# Altium PCB DustCollectorSwitch.PcbDoc
Units mm, origin at the board's own origin, x right, y up, seen from the top; angles counter-clockwise.
Board outline 53.34 x 68.71 mm, 2 copper layers (Top Layer, Bottom Layer); 52 components, 30 nets, 162 pads, 40 vias.
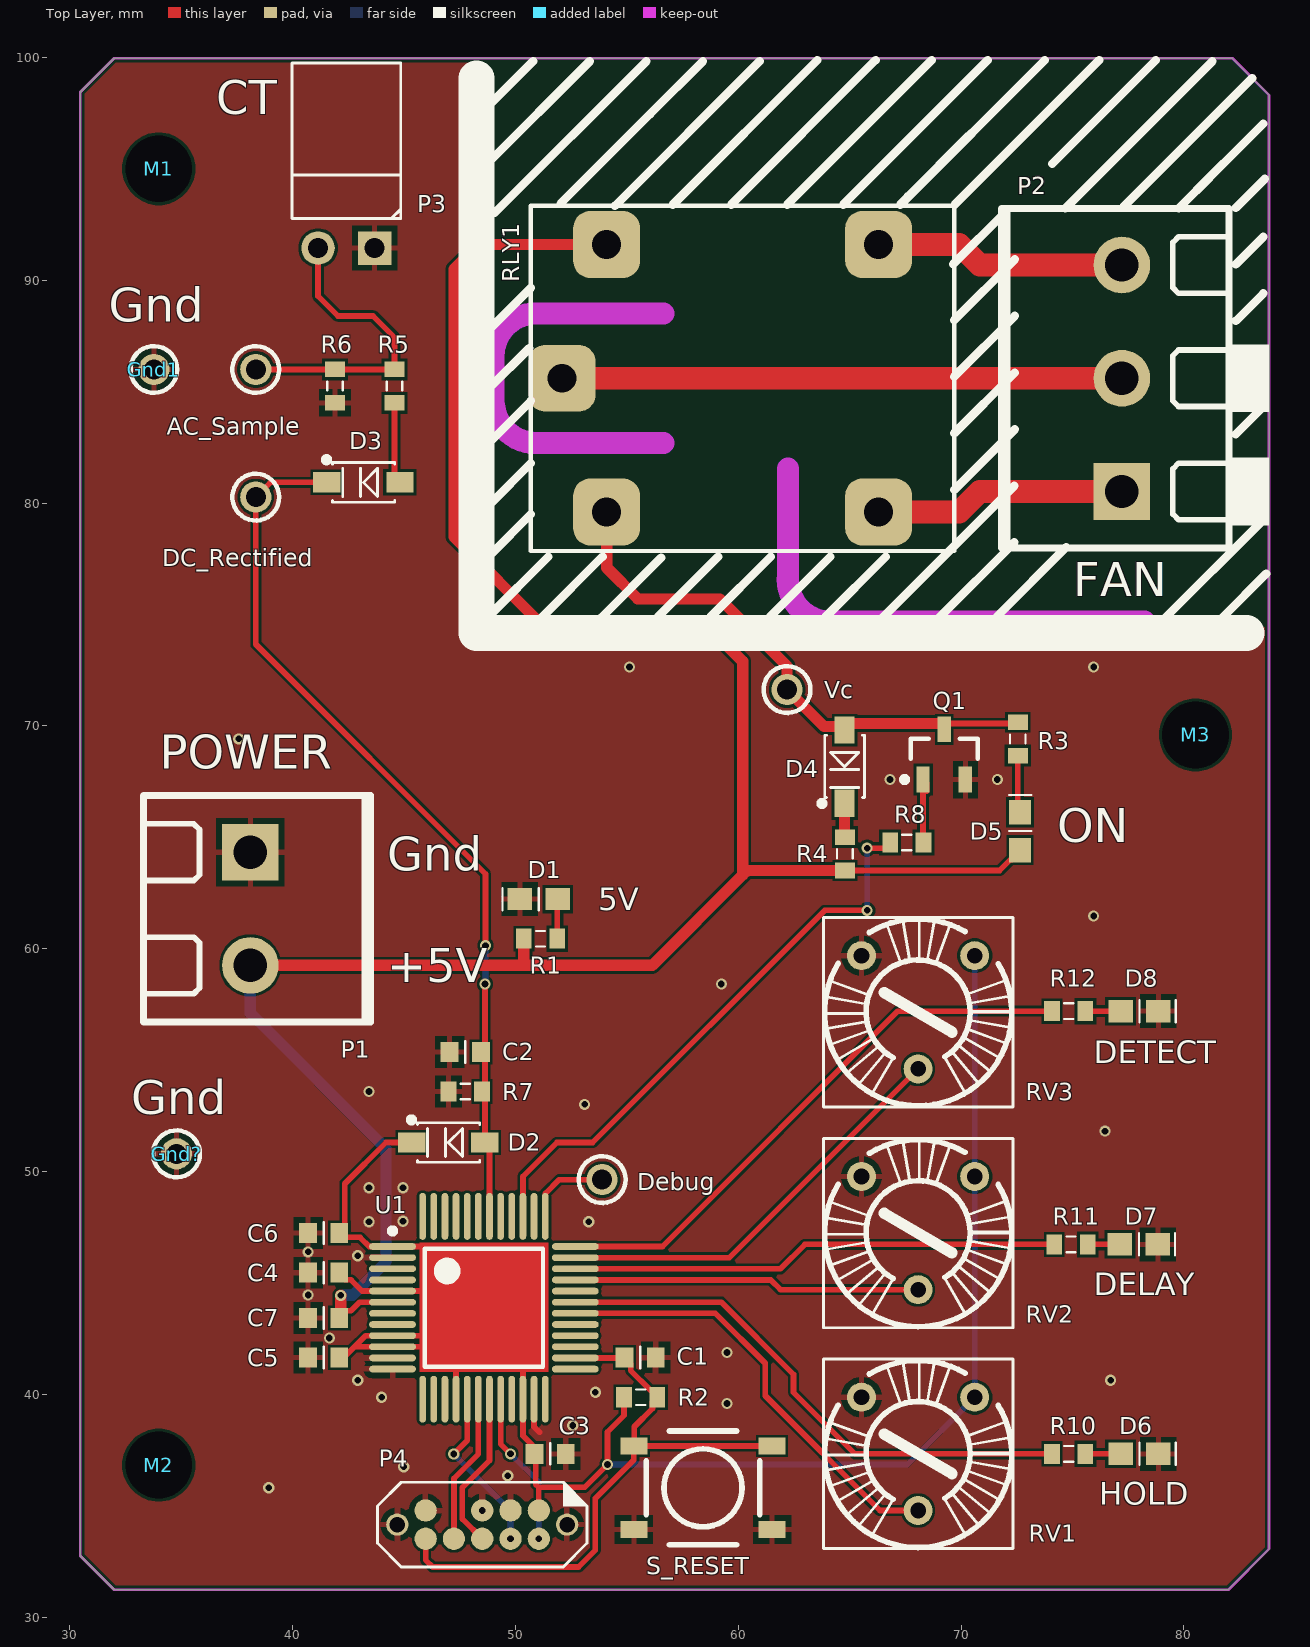
[diagram p0: Top Layer view]
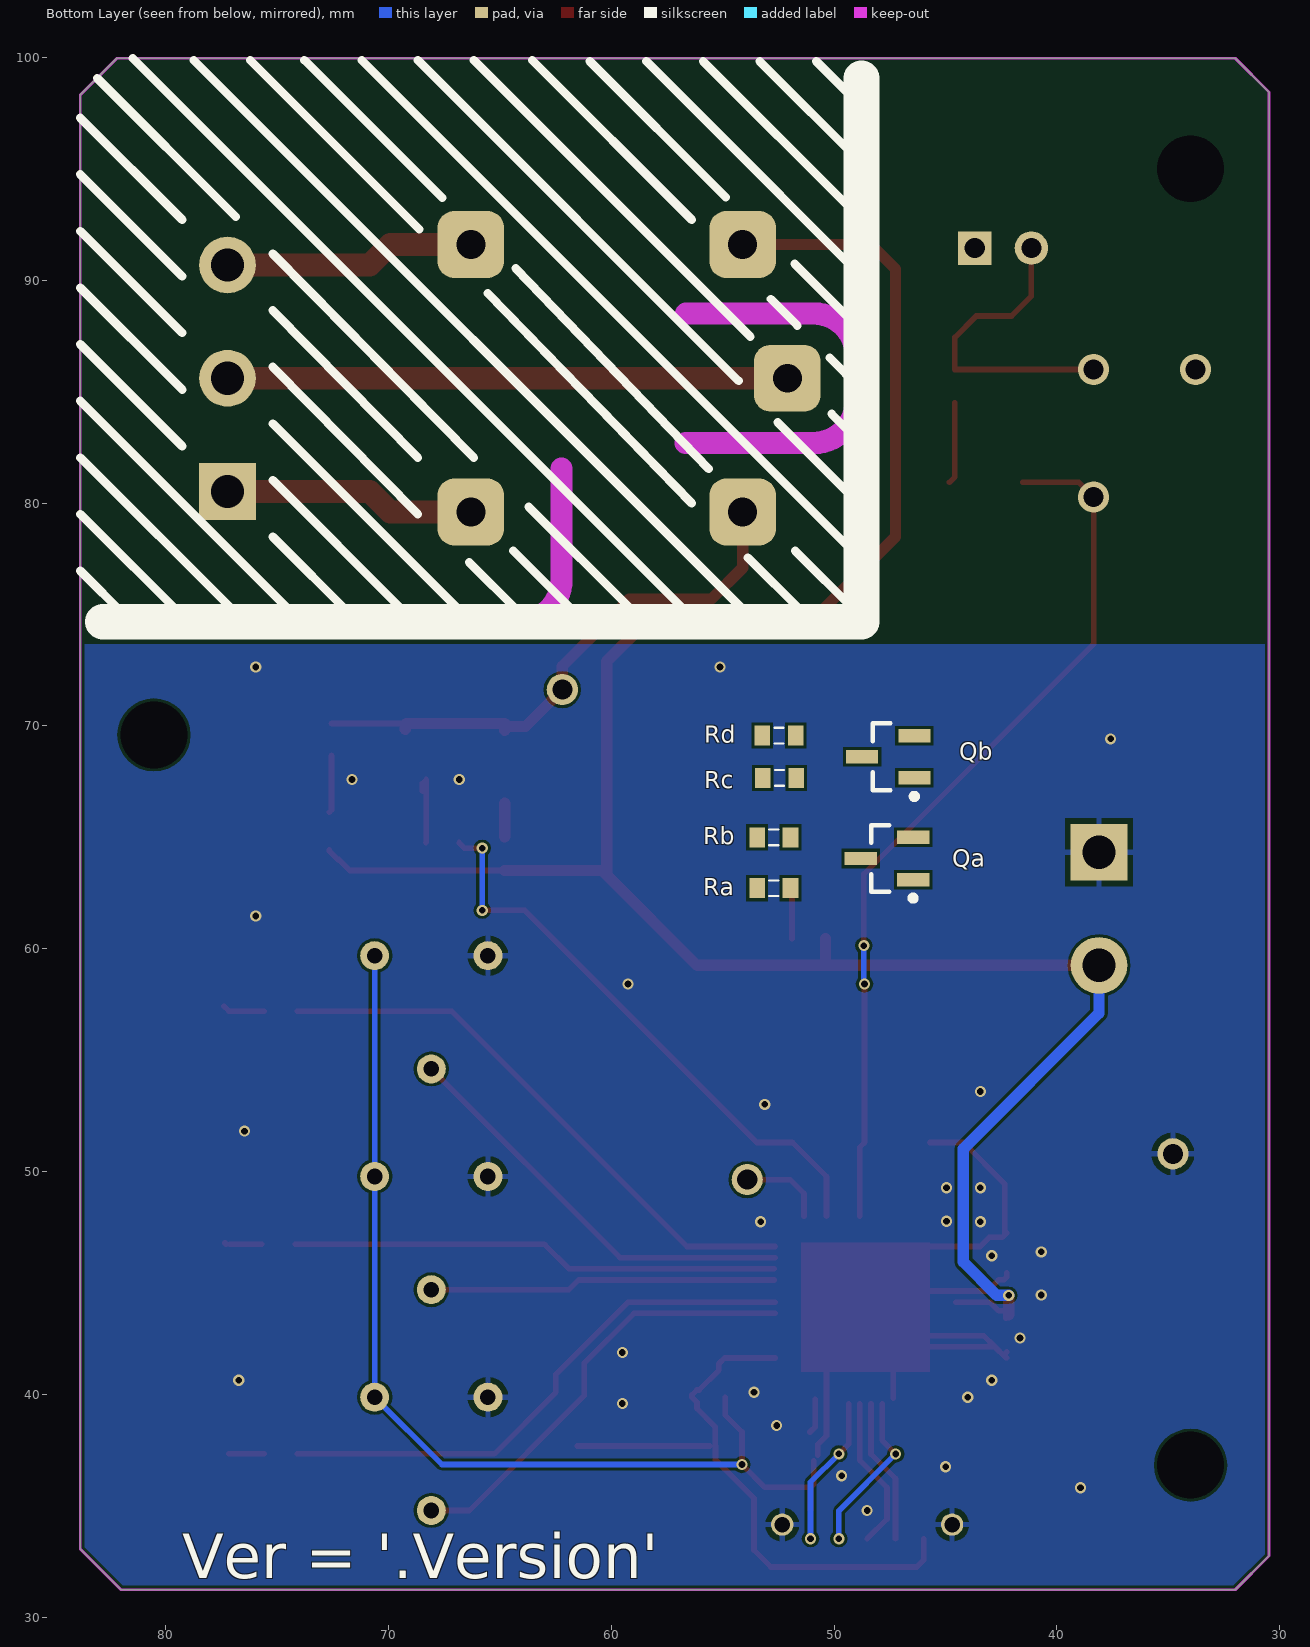
[diagram p1: Bottom Layer view, seen from below]
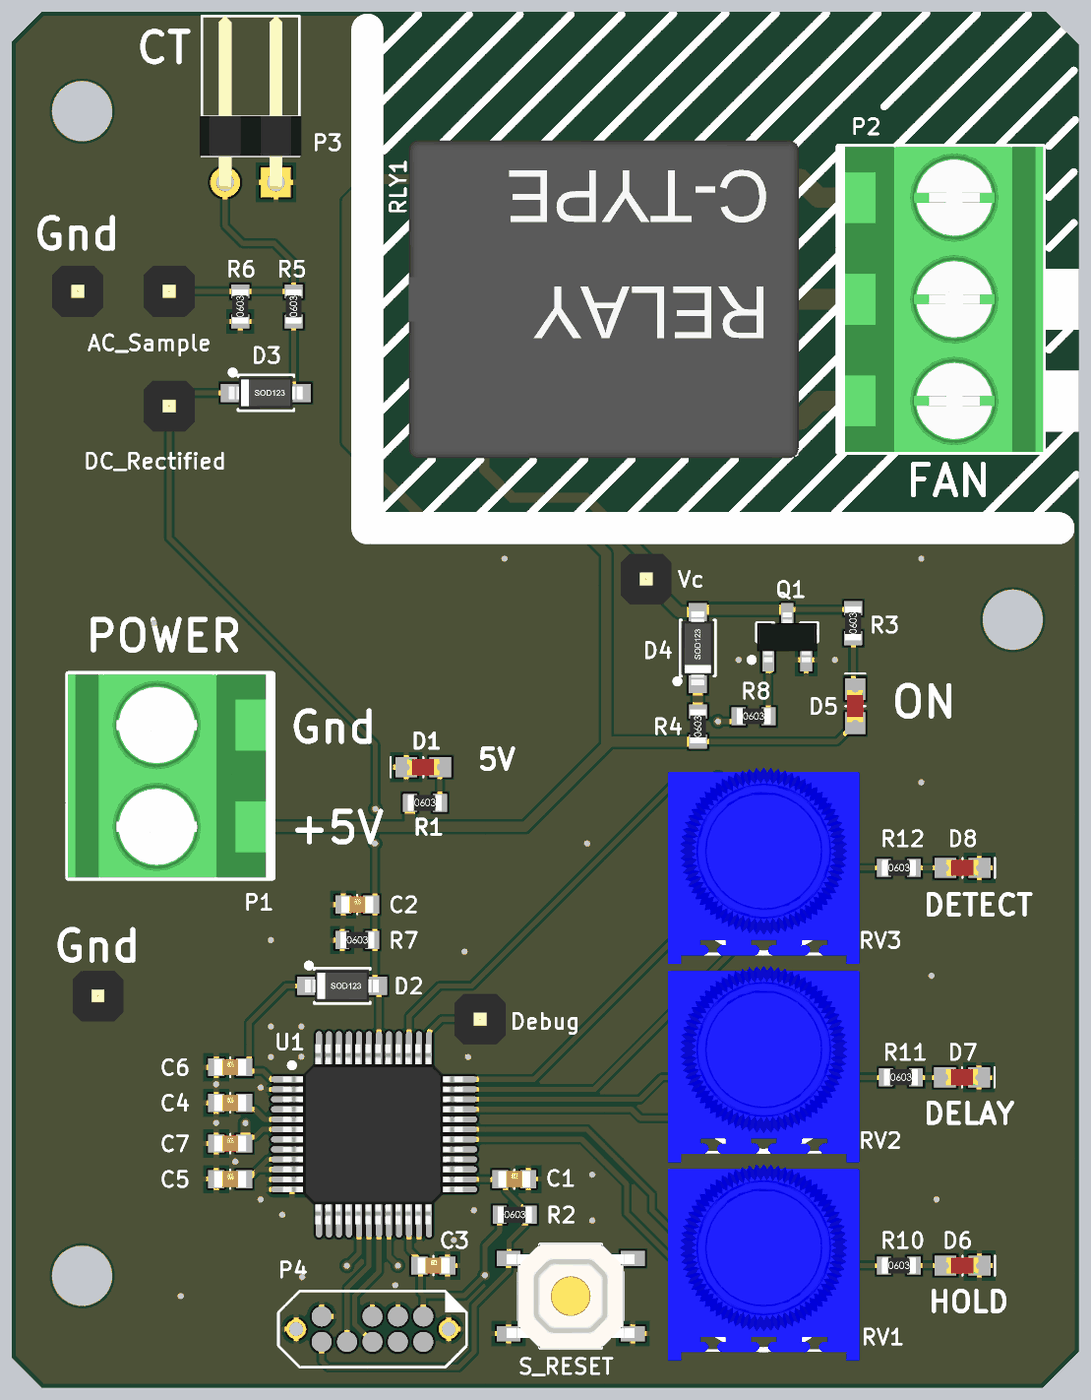
[diagram p2: 3D render of the assembled board from above, using the file's embedded part models]
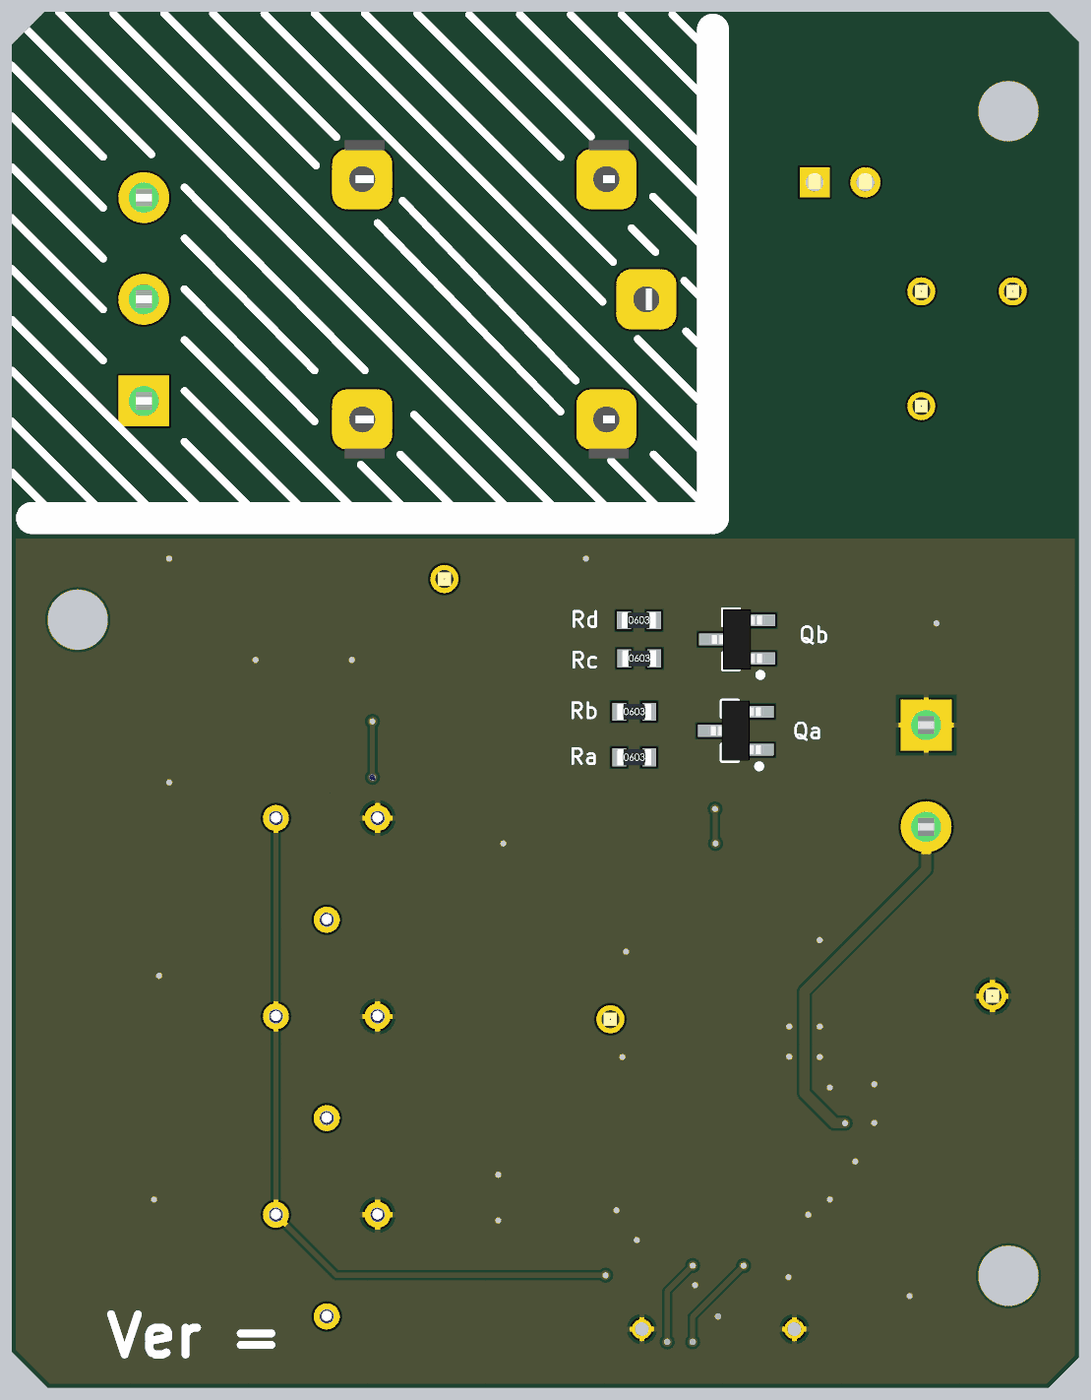
[diagram p3: 3D render of the assembled board from below, using the file's embedded part models]

## Layer stack, top to bottom
Top Solder: solder mask 0.0102, Solder Resist, Dk 3.5
Top Layer: signal copper 0.0356
Dielectric1: dielectric 0.32, FR-4, Dk 4.8
Bottom Layer: signal copper 0.0356
Bottom Solder: solder mask 0.0102, Solder Resist, Dk 3.5

## Board outline
32,31.242 30.48,32.762 30.48,98.434 32,99.954 82.18,99.954 83.82,98.314 83.82,33.062 82,31.242

## Design rules (kind name [scope] priority, off if disabled: settings)
Clearance [All] p1: gap=0.127 ignorepadtopadclearanceinfootprint=FALSE
HoleSize [All] p1: absolutevalues=TRUE maxlimit=3.5 minlimit=0.025 maxpercent=80.000 minpercent=20.000
MinimumSolderMaskSliver [All] p1 off: minsoldermaskwidth=0.254
PolygonConnect PolygonConnect_Via [IsPolygon vs IsVia] p1: connectstyle=Direct reliefconductorwidth=0.254 reliefentries=4 polygonreliefangle="90 Angle" airgapwidth=0.254
PolygonConnect [All] p2: connectstyle=Relief reliefconductorwidth=0.254 reliefentries=4 polygonreliefangle="90 Angle" airgapwidth=0.254
RoomDefinition DustCollectorSwitch_V2 [InComponentClass('DustCollectorSwitch_V2')] p1: confinementstyle=ConfineIn formatcopy=TRUE lockcomponents=FALSE outline 25.4,27.915 88.9,27.915 88.9,105.791 25.4,105.791
RoutingVias [All] p1: holewidth=0.711 width=1.27 viastyle="Through Hole" minholewidth=0.711 minwidth=1.27 maxholewidth=0.711 maxwidth=1.27
SilkToSolderMaskClearance SilkscreenOverComponentPads [IsPad] p1 off: minsilkscreentomaskgap=0.254 clearancetoexposedcopper=TRUE
SolderMaskExpansion SolderMaskExpansion_Via [isVia] p1: expansion=0.102 istentingtop=TRUE
SolderMaskExpansion [All] p2: expansion=0.102 istentingtop=FALSE
Width [All] p1: maxlimit=1.016 minlimit=0.254 preferedwidth=0.254
27 further rules are at their usual default settings.

## Components (designator, comment, footprint, x,y, rotation, side; value= is the part's Value field where it differs from the comment)
AC_Sample "" "PCBPIN - 0.9mm" 38.354,85.993 r0 top
C1 "100nF" CCNP1608-0603_N 55.601,41.656 r0 top
C2 "100nF" CCNP1608-0603_N 47.752,55.372 r0 top
C3 "100nF" CCNP1608-0603_N 51.562,37.338 r0 top
C4 "100nF" CCNP1608-0603_N 41.402,45.466 r0 top
C5 "100nF" CCNP1608-0603_N 41.402,41.656 r0 top
C6 "2.2uF" CCNP1608-0603_N 41.402,47.244 r0 top
C7 "1uF" CCNP1608-0603_N 41.402,43.434 r0 top
D1 "LED Red" LED1608-0603-RED 51.054,62.23 r0 top
D2 "1N4148W" SOD-123 46.99,51.308 r0 top
D3 "1N4148W" SOD-123 43.18,80.926 r0 top
D4 "1N4148W" SOD-123 64.77,68.17 r90 top
D5 "LED Red" LED1608-0603-RED 72.644,65.278 r270 top
D6 "LED Red" LED1608-0603-RED 78.003,37.338 r180 top
D7 "LED Red" LED1608-0603-RED 77.978,46.736 r180 top
D8 "LED Red" LED1608-0603-RED 78.003,57.201 r180 top
DC_Rectified "" "PCBPIN - 0.9mm" 38.354,80.264 r0 top
Debug "Vdd" "PCBPIN - 0.9mm" 53.895,49.642 r0 top
Gnd1 "Gnd" "PCBPIN - 0.9mm" 33.782,85.993 r0 top
Gnd? "Gnd" "PCBPIN - 0.9mm" 34.798,50.8 r0 top
M1 "Mounting hole" "3mm hole" 34,94.996 r0 top
M2 "Mounting hole" "3mm hole" 34,36.83 r0 top
M3 "Mounting hole" "3mm hole" 80.518,69.596 r0 top
P1 "Terminal2_5.08mm" MOLEX-39544-3002 38.112,64.333 r180 top
P2 "Terminal3_5.08mm" MOLEX-39544-3003 77.216,80.518 r0 top
P3 "Header, 2-Pin, Right Angle" HDR1X2H 43.688,91.44 r180 top
P4 "SWD Connector 2x5-Pin" SWD-2x5-Jig-Pads 51.054,34.798 r180 top
Q1 "MMBT3904LT1G" SOT23_N 69.244,68.718 r270 top
Qa "DNP" SOT23_M 47.625,64.049 r180 bottom
Qb "DNP" SOT23_M 47.567,68.615 r180 bottom
R1 "1K" CR1608-0603_N 51.134,60.452 r0 top
R2 "1K" CR1608-0603_N 55.626,39.878 r0 top
R3 "1K" CR1608-0603_N 72.546,69.418 r90 top
R4 "220R" CR1608-0603_N 64.786,64.262 r90 top
R5 "470R" CR1608-0603_N 44.577,85.243 r90 top
R6 "470R" CR1608-0603_N 41.91,85.243 r90 top
R7 "10K" CR1608-0603_N 47.752,53.594 r0 top value=10k
R8 "220R" CR1608-0603_N 67.564,64.77 r0 top
R10 "1K" CR1608-0603_N 74.828,37.338 r0 top
R11 "1K" CR1608-0603_N 74.93,46.736 r0 top
R12 "1K" CR1608-0603_N 74.828,57.201 r0 top
Ra "DNP" CR1608-0603_N 52.705,62.718 r180 bottom
Rb "DNP" CR1608-0603_N 52.705,64.999 r180 bottom
Rc "DNP" CR1608-0603_N 52.451,67.665 r180 bottom
Rd "DNP" CR1608-0603_N 52.47,69.565 r180 bottom
RLY1 "ORWH-SH-105D1F,000" "RELAY - ORWH-SH" 60.198,85.598 r0 top
RV1 "1K" RV_PCB5 68.072,37.338 r270 top
RV2 "1K" RV_PCB5 68.072,47.244 r270 top
RV3 "1K" RV_PCB5 68.072,57.15 r270 top
S_RESET "SMD-SW-4_5.1x5.1x3.5_M" SMD-SW-4_5.1x5.1x3.5_M 58.42,35.814 r0 top
U1 "MK20DX128VLF5" TSQFP50P900X900-48M 48.59,43.891 r270 top
Vc "" "PCBPIN - 0.9mm" 62.192,71.628 r0 top

## Footprints (in the part's own frame and the unit in brackets; to place one, negate y for a bottom-side part, rotate by r counter-clockwise, add the part's x,y. Pads: shape width x height; smd on the part's side, far side on the other; paste and mask are expansions set on the pad)
"3mm hole" [mil]
  round 60 hole 118.11: 0(0,0)
CCNP1608-0603_N [mm]
  rect 0.8x0.9 smd: 1(-0.7,0) 2(0.7,0)
  silkscreen extent 0,-0.48 0,0.48, body extent -0.8,-0.4 0.8,0.4, height 0.3
CR1608-0603_N [mm]
  rect 0.7x0.9 smd: 1(-0.75,0) 2(0.75,0)
  silkscreen extent -0.2,-0.35 0.2,0.35, body extent -0.85,-0.4 0.85,0.4, height 0.56
HDR1X2H [mm] "Header; 2 Position; Right Angle"
  rect 1.5x1.5 hole 0.9: 1(0,0)
  round 1.5 hole 0.9: 2(2.54,0)
  silkscreen extent -1.17,-8.31 3.71,-1.32, body extent -1.27,-8.3 3.81,0.33, height 2.54
LED1608-0603-RED [mm] "SMT-LED 0603"
  rect 1.1x1 smd: A(0.85,0) K(-0.85,0)
  silkscreen extent -1.62,-0.5 0,0.5, body extent -0.8,-0.4 0.8,0.4, height 0.7
MOLEX-39544-3002 [mm] "Wire-To-Board Terminal Block"
  rect 2.54x2.54 hole 1.5: 1(0,0)
  round 2.54 hole 1.5: 2(0,5.08)
  silkscreen extent -5.4,-2.54 4.83,7.62, body extent -5.08,-2.54 4.83,7.62, height 14.6
MOLEX-39544-3003 [mm] "Wire-To-Board Terminal Block"
  rect 2.54x2.54 hole 1.5: 1(0,0)
  round 2.54 hole 1.5: 2(0,5.08) 3(0,10.16)
  silkscreen extent -5.4,-2.54 4.83,12.7, body extent -5.08,-2.54 4.83,12.7, height 14.6
"PCBPIN - 0.9mm" [mm]
  round 1.4 hole 0.9: 1(0,0)
  silkscreen extent -1.05,-1.05 1.05,1.05, body extent -1.27,-1.27 1.27,1.27, height 6
"RELAY - ORWH-SH" [mm] "Relay, PCB Mount, ORWH Series"
  rrect50% 3x3 hole 1.3: C1(-6.1,6) C2(-6.1,-6) COM(-8.1,0) NC(6.1,6) NO(6.1,-6)
  silkscreen extent -9.5,-7.75 9.5,7.75, body extent -9.88,-7.95 9.62,7.95, height 15
RV_PCB5 [mm] "Vishay 63M-T607 (F347-292 or similar)"
  round 1.3 hole 0.7: CCW(-2.54,-2.54) CW(-2.54,2.54) W(2.54,0)
  silkscreen extent -4.25,-4.25 4.25,4.25, body extent -5.08,-4.79 4.75,4.79, height 4.42
SMD-SW-4_5.1x5.1x3.5_M [mm] "Miniature SMD PCB Push Button - C318886"
  rect 1.2x0.762 smd: 1(3.1,-1.875) 1b(-3.1,-1.875) 2(3.1,1.875) 2b(-3.1,1.875)
  silkscreen extent -2.55,-2.55 2.55,2.55, body extent -3.2,-2.65 3.2,2.65, height 3.5
SOD-123 [mm] "SOD-123; 2 Leads; Body 2.7 x 1.6 mm, (LxW)"
  rect 1.22x0.91 smd: A(1.64,0) K(-1.64,0)
  silkscreen extent -1.78,-0.89 1.41,1.14, body extent -1.85,-0.77 1.85,0.78, height 1.35
SOT23_M [mm] "SOT23, 3-Leads, Body 2.9x1.3mm, Pitch 0.95mm, Lead Span 2.3mm - IPC Low Density"
  rect 1.45x0.6 smd: 1(1.175,-0.95) 2(1.175,0.95) 3(-1.175,0)
  silkscreen extent -0.7,-1.9 1.29,1.5, body extent -1.25,-1.5 1.25,1.5, height 1.05
SOT23_N [mm] "SOT23, 3-Leads, Body 2.9x1.3mm, Pitch 0.95mm, Lead Span 2.3mm - IPC Medium Density"
  rect 1.15x0.6 smd: 1(1.125,-0.95) 2(1.125,0.95) 3(-1.125,0)
  silkscreen extent -0.7,-1.9 1.25,1.5, body extent -1.25,-1.5 1.25,1.5, height 1.05
SWD-2x5-Jig-Pads [mm] "Connector; SWD; 2x5 Position"
  round 1 hole 0.69: 0(-1.27,0.635) 0(6.35,0.635)
  round 1 smd: 1(0,0) 2(0,1.27) 3(1.27,0) 4(1.27,1.27) 5(2.54,0) 6(2.54,1.27) 8(3.81,1.27) 9(5.08,0) 10(5.08,1.27)
  silkscreen extent -2.16,-1.26 7.24,2.53
TSQFP50P900X900-48M [mm] "Thin QFP, 48-Leads, Body 7x7mm, Pitch 0.5mm, IPC Low Density"
  oval 0.3x2.1 smd: 1(-2.75,-4.1) 2(-2.25,-4.1) 3(-1.75,-4.1) 4(-1.25,-4.1) 5(-0.75,-4.1) 6(-0.25,-4.1) 7(0.25,-4.1) 8(0.75,-4.1) 9(1.25,-4.1) 10(1.75,-4.1) 11(2.25,-4.1) 12(2.75,-4.1) 25(2.75,4.1) 26(2.25,4.1) 27(1.75,4.1) 28(1.25,4.1) 29(0.75,4.1) 30(0.25,4.1) 31(-0.25,4.1) 32(-0.75,4.1) 33(-1.25,4.1) 34(-1.75,4.1) 35(-2.25,4.1) 36(-2.75,4.1)
  oval 2.1x0.3 smd: 13(4.1,-2.75) 14(4.1,-2.25) 15(4.1,-1.75) 16(4.1,-1.25) 17(4.1,-0.75) 18(4.1,-0.25) 19(4.1,0.25) 20(4.1,0.75) 21(4.1,1.25) 22(4.1,1.75) 23(4.1,2.25) 24(4.1,2.75) 37(-4.1,2.75) 38(-4.1,2.25) 39(-4.1,1.75) 40(-4.1,1.25) 41(-4.1,0.75) 42(-4.1,0.25) 43(-4.1,-0.25) 44(-4.1,-0.75) 45(-4.1,-1.25) 46(-4.1,-1.75) 47(-4.1,-2.25) 48(-4.1,-2.75)
  silkscreen extent -3.57,-4.22 2.65,2.65, body extent -4.5,-4.55 4.5,4.45, height 1.6

## Part data
AC_Sample DC_Rectified Debug Gnd1 Gnd? Vc: library part TP, "Test Point"
C1 C2 C3 C4 C5: library part Cap_CCNP_0603_100nF, "Capacitor non-polar SMT 0603", LCSC=C14663, Manufacturer="Generic Components", Class=Passive, Published=08/06/2000, Publisher="Altium Hobart Technology Centre", SubClass=Capacitor
C6: library part Cap, "Capacitor", LCSC=C23630, Manufacturer="Generic Components", Class=Passive, Published=08/06/2000, Publisher="Altium Hobart Technology Centre", SubClass=Capacitor
C7: library part Cap, "Capacitor", LCSC=C15849, Manufacturer="Generic Components", Class=Passive, Published=08/06/2000, Publisher="Altium Hobart Technology Centre", SubClass=Capacitor
D1 D5 D6 D7 D8: library part LED-0603-Red, "LED 0603 Red", LCSC=C2286, Manufacturer="Generic Components", Class I=Optoelectronic, Class II=LED, Farnell PN=1581239, Published=8-Jun-2000, Publisher="Altium Limited", Revision="July-2002: Re-released for DXP Platform."
D2 D3 D4: "Diode - Switching 75V 150mA 1.25V @ 150mA 4ns, SOD-123", LCSC=C81598, Class=Discrete, SubClass="Diode - Switching"
M1 M2 M3: library part Mounting_Hole
P1: "MULTICOMP MC24366 TERMINAL BLOCK EUROSTYLE, 2 POSITION, 26-12AWG, 5.08mm", Farnell PN=2396251
P2: "MULTICOMP MC24367 TERMINAL BLOCK EUROSTYLE, 3 POSITION, 26-12AWG, 5.08mm"
P3: library part "Header 1x2H", LatestRevisionDate=17-Jul-2002, LatestRevisionNote="Re-released for DXP Platform.", Publisher="Altium Limited"
P4: library part SWD2X5_JIG, Farnell PN=1865285, LatestRevisionDate=17-Jul-2002, LatestRevisionNote="Re-released for DXP Platform.", Publisher="Altium Limited"
Q1: "General Purpose Transistor, NPN Silicon, 3-Pin SOT-23, Pb-Free, Tape and Reel", LCSC=C20526, Manufacturer="On Semiconductor", ComponentLink1Description="Manufacturer URL", ComponentLink1URL=http://www.onsemi.com/, ComponentLink2Description=Datasheet, ComponentLink2URL=http://www.onsemi.cn/pub_link/Collateral/MMBT3904LT1-D.PDF, ComponentLink3Description="Package Specification", ComponentLink3URL=http://www.onsemi.cn/pub_link/Collateral/318-08.PDF, DatasheetVersion="Rev. 12", fT Min (MHz)=300, IC Continuous (A)=0.2, Mounting Technology="Surface Mount", PackageDescription="3-Pin Small Outline Transistor, Body 2.92 x 1.3 mm, Pitch 0.95 mm", PackageReference=SOT-23-3-318-08, PackageVersion="Rev. AP, 11/2009", Packing="Tape and Reel", PartNumber=MMBT3904LT1G, Polarity=NPN, RoHS=TRUE
Qa Qb: library part MMBT3904LT1G, "SOT23", ComponentLink1Description="Manufacturer URL", ComponentLink1URL=http://www.onsemi.com/, ComponentLink2Description=Datasheet, ComponentLink2URL=http://www.onsemi.cn/pub_link/Collateral/MMBT3904LT1-D.PDF, ComponentLink3Description="Package Specification", ComponentLink3URL=http://www.onsemi.cn/pub_link/Collateral/318-08.PDF
R1 R2 R3 R10 R11 R12: library part Res_CR0603, "Resistor SMT 0603", LCSC=C21190, Manufacturer="Generic Components", Class=Passive, Published=08/06/2000, Publisher="Altium Hobart Technology Centre", SubClass=Resistor
R4 R8: library part Res_CR0603_220R, "Resistor SMT 0603", LCSC=C22962, Manufacturer="Generic Components", Class=Passive, Published=08/06/2000, Publisher="Altium Hobart Technology Centre", SubClass=Resistor
R5 R6: library part Res_CR0603_470R, "Resistor SMT 0603", LCSC=C23179, Manufacturer="Generic Components", Class=Passive, Published=08/06/2000, Publisher="Altium Hobart Technology Centre", SubClass=Resistor
R7: library part Res_CR0603_10k, "Resistor SMT 0603", LCSC=C25804, Manufacturer="Generic Components", Class=Passive, Published=08/06/2000, Publisher="Altium Hobart Technology Centre", SubClass=Resistor
Ra Rb Rc Rd: library part Res_CR0603, "Resistor SMT 0603", Manufacturer="Generic Components", Class=Passive, Published=08/06/2000, Publisher="Altium Hobart Technology Centre", SubClass=Resistor
RLY1: library part "Relay - ORWH-SH-105D1F", "Relay, ORWH Series, Power, Non Latching, SPDT, 5 VDC, 10 A", Farnell PN=1181034
RV1 RV2 RV3: library part POT_BOURNS_3362P, "Trim Pot - single turn horizontal", Farnell PN="9354298 or similar"
S_RESET: library part SW_PB-TS, "Tactile Switch SPST 5.10mm X 5.10mm / (1.5mm=C318884) / (2.0mm=C318888) / (3.5mm=C318886)", LCSC=C318886, Revision=1.0
U1: "Micro Kinetis K20: 50MHz Cortex-M4 Performance MCU, 160KB Flash, 16KB SRAM, Full-Speed USB, 48-LQFP", Digikey=MK20DX128VLF50-ND, Farnell PN=2133571, Mouser=841-MK20DX128VLF5

## Via types
v1: diameter 0.5, hole 0.3, Top Layer to Bottom Layer, tented both sides, 40 vias

## Nets (pads, with @x,y where several pads share a name; then routed paths per layer and width w, separated by ;. In a path a pad name is that pad's centre, name@x,y a point inside that pad or via, vN(x,y) a via of type N, cw(c..) or ccw(c..) an arc to the next point about the centre after c; other vN are vias at no path point)
3V3: C3.1 C4.2 C5.2 C6.2 D2.K P4.1 R2.1 RV1.CW RV2.CW RV3.CW U1.1 U1.5 U1.9 U1.10 U1.16 U1.22 | length 78.9
  Top Layer w0.254: C5.2@42.252,41.656 42.302,41.656 42.787,42.141 ; C5.2@42.252,41.91 C5.2@42.275,41.887 ; C4.2@42.252,45.466 42.252,45.266 42.375,45.143 42.625,45.143 43.127,44.641 46.622,44.641 46.634,44.653 ; C6.2@42.252,47.244 42.446,47.05 43.034,47.05 43.443,46.641 45.84,46.641 46.292,46.189 46.622,46.189 ; C6.2@42.347,47.244 42.347,49.459 44.196,51.308 D2.K D2.K@45.7,51.308 ; U1.9 43.287,42.641 42.787,42.141 ; U1.9@44.54,42.641 46.622,42.641 ; 46.34,42.141 42.787,42.141 ; 47.324,41.641 47.34,41.625 U1.16@47.34,39.841 ; 50.089,41.783 50.34,41.532 50.34,38.405 ; U1.22 50.34,38.151 50.725,37.766 C3.1@50.725,37.271 ; C3.1@50.917,37.029 50.917,35.97 51.054,35.833 ; P4.1 51.054,35.833 ; R2.1 54.876,39.062 54.134,38.32 v1(54.134,36.857) 53.11,35.833 51.054,35.833
  Bottom Layer w0.254: v1(54.134,36.857) 67.591,36.857 RV1.CW RV2.CW RV3.CW
5V: C7.2 D5.A P1.2 R1.1 R4.1 RLY1.C1 U1.6 | length 104.1
  Top Layer w0.254: C7.2@42.302,43.434 42.302,43.684 42.375,43.757 42.625,43.757 43.009,44.141 U1.6@44.54,44.141 ; R4.1 71.728,63.512 72.221,64.005 72.271,64.005 72.644,64.378 D5.A
  Top Layer w0.508: P1.2 50.379,59.253 ; C7.2@42.164,43.572 v1(42.164,44.45) ; R1.1 50.384,59.258 50.379,59.253 ; RLY1.C1 48.349,91.598 47.244,90.493 47.244,78.486 51.308,74.422 58.674,74.422 60.198,72.898 60.198,63.557 60.198,63.306 ; R4.1 60.404,63.512 60.198,63.306 ; 50.379,59.253 56.145,59.253 60.198,63.306
  Bottom Layer w0.508: P1.2 38.112,57.111 44.196,51.027 44.196,45.949 42.697,44.45 v1(42.164,44.45)
AC_Sample: AC_Sample.1 P3.2 R5.2 R6.2 | length 14
  Top Layer w0.254: AC_Sample.1 R6.2 R5.2 44.577,87.432 43.617,88.392 42.037,88.392 41.148,89.281 P3.2
COM: P2.2 RLY1.COM | length 25.1
  Top Layer w1.016: RLY1.COM P2.2
CurrentSample: C2.2 D2.A D3.K DC_Rectified.1 R7.2 U1.42 | length 40.1
  Top Layer w0.254: D3.K 39.016,80.926 DC_Rectified.1 38.354,73.66 48.662,63.352 v1(48.662,60.142) ; v1(48.635,58.42) 48.635,51.313 D2.A 48.84,51.098 U1.42
  Bottom Layer w0.254: v1(48.635,58.42) 48.662,58.447 v1(48.662,60.142)
DelayControl: RV2.W U1.33 | length 15.6
  Top Layer w0.254: U1.33 61.46,45.141 61.897,44.704 RV2.W
DelayLed: R11.1 U1.34 | length 21.9
  Top Layer w0.254: U1.34 61.897,45.641 62.992,46.736 R11.1
DetectLed: R12.1 U1.36 | length 25.8
  Top Layer w0.254: U1.36@52.64,46.641 56.599,46.641 67.159,57.201 R12.1
GND: C1.2 C2.1 C3.2 C4.1 C5.1 C6.1 C7.1 D1.K D6.K D7.K D8.K Gnd1.1 Gnd?.1 P1.1 P3.1 P4.0 P4.3 P4.5 P4.9 Q1.2 R6.1 R7.1 RV1.CCW RV2.CCW RV3.CCW S_RESET.1 S_RESET.1b U1.2 U1.11 U1.12 U1.23 | length 1.6
  Top Layer w0.254: U1.23 50.84,38.556 51.09,38.306
  other v1: 48.514,34.798 38.938,35.814 49.659,36.355 44.995,36.761 52.578,38.608 59.499,39.594 44.001,39.878 53.59,40.102 42.926,40.64 76.708,40.64 59.499,41.882 41.656,42.533 40.702,44.465 42.926,46.228 40.702,46.4 43.434,47.752 53.293,47.752 44.958,47.773 43.434,49.276 44.958,49.276 76.454,51.816 53.11,53.017 43.434,53.594 59.245,58.42 75.946,61.468 66.814,67.593 71.628,67.593 37.592,69.418 55.118,72.644 75.946,72.644
HoldControl: RV1.W U1.30 | length 19.9
  Top Layer w0.254: U1.30@52.64,43.641 58.975,43.641 61.214,41.402 61.214,39.947 66.363,34.798 RV1.W
HoldLed: R10.1 U1.31 | length 24.7
  Top Layer w0.254: U1.31@52.64,44.141 59.245,44.141 62.484,40.902 62.484,40.095 65.241,37.338 R10.1
LevelControl: RV3.W U1.35 | length 18.9
  Top Layer w0.254: U1.35@52.64,46.141 59.603,46.141 RV3.W
N/C: P2.3 RLY1.NC | length 11.3
  Top Layer w1.016: RLY1.NC 69.916,91.598 70.836,90.678 P2.3
N/O: P2.1 RLY1.NO | length 11.3
  Top Layer w1.016: RLY1.NO 69.916,79.598 70.836,80.518 P2.1
NetD1_A: D1.A R1.2 | length 1.8
  Top Layer w0.254: R1.2 51.884,62.21 D1.A
NetD3_A: D3.A R5.1 | length 3.7
  Top Layer w0.254: R5.1 44.577,81.169 D3.A
NetD4_K: D4.K R4.2 | length 1.5
  Top Layer w0.508: D4.K 64.77,65.028 R4.2
NetD5_K: D5.K R3.1 | length 2.6
  Top Layer w0.254: R3.1 72.546,66.226 D5.K
NetD6_A: D6.A R10.2 | length 1.6
  Top Layer w0.254: R10.2 D6.A
NetD7_A: D7.A R11.2 | length 1.5
  Top Layer w0.254: R11.2 D7.A ; D7.A@77.269,46.736 D7.A@77.33,46.797
NetD8_A: D8.A R12.2 | length 1.9
  Top Layer w0.254: R12.2 D8.A D8.A@77.38,57.428
NetDebug_1: Debug.1 U1.37 | length 3.8
  Top Layer w0.254: U1.37 51.349,48 51.349,49.019 51.971,49.642 Debug.1
NetQ1_1: Q1.1 R8.2 | length 3.4
  Top Layer w0.254: R8.2 68.294,64.79 Q1.1 68.467,67.42 Q1.1@68.467,67.071
RELAY: D4.A Q1.3 R3.2 RLY1.C2 Vc.1 | length 24.6
  Top Layer w0.254: Q1.3@69.417,70.104 R3.2@72.546,70.104
  Top Layer w0.508: RLY1.C2 54.098,77.093 55.499,75.692 59.182,75.692 62.192,72.682 Vc.1 63.851,69.969 64.611,69.969 D4.A ; D4.A@64.77,70.104 69.198,70.104 69.244,70.058 Q1.3
RelayDrive: R8.1 U1.39 | length 26.1
  Top Layer w0.254: U1.39 50.34,49.784 51.864,51.308 53.467,51.308 63.881,61.722 v1(65.786,61.722) ; v1(65.786,64.516) 66.591,64.516 66.814,64.739 R8.1
  Bottom Layer w0.254: v1(65.786,61.722) v1(65.786,64.516)
RESETb: C1.1 P4.10 R2.2 S_RESET.2 S_RESET.2b U1.26 | length 27.7
  Top Layer w0.254: P4.10 45.974,32.576 46.292,32.258 52.832,32.258 53.59,33.016 53.59,35.342 55.32,37.073 S_RESET.2b 55.335,37.704 55.335,38.556 56.153,39.374 56.153,39.655 R2.2 56.376,39.978 56.153,40.201 56.053,40.201 55.174,41.08 55.174,41.383 C1.1 54.886,41.641 U1.26@52.64,41.641 ; S_RESET.2b@55.574,37.689 S_RESET.2
SWD_CLK: P4.4 U1.17 | length 7.4
  Top Layer w0.254: v1(47.235,37.33) 47.84,37.935 U1.17@47.84,39.587
  Bottom Layer w0.254: v1(47.235,37.33) 49.784,34.781 v1(49.784,33.528)
SWD_DIO: P4.2 U1.20 | length 6.8
  Top Layer w0.254: U1.20@49.34,39.587 49.34,37.782 v1(49.784,37.338)
  Bottom Layer w0.254: v1(49.784,37.338) 51.054,36.068 v1(51.054,33.528)
SWD_Rx: P4.8 U1.18 | length 6.5
  Top Layer w0.254: P4.8 47.244,36.234 48.34,37.33 U1.18@48.34,39.587
SWD_Tx: P4.6 U1.19 | length 6.9
  Top Layer w0.254: P4.6 47.625,34.417 47.625,35.825 48.84,37.04 U1.19@48.84,39.587
pads on no net: M1.0 M2.0 M3.0 Qa.1 Qa.2 Qa.3 Qb.1 Qb.2 Qb.3 Ra.1 Ra.2 Rb.1 Rb.2 Rc.1 Rc.2 Rd.1 Rd.2 U1.3 U1.4 U1.7 U1.8 U1.13 U1.14 U1.15 U1.21 U1.24 U1.25 U1.27 U1.28 U1.29 U1.32 U1.38 U1.40 U1.41 U1.43 U1.44 U1.45 U1.46 U1.47 U1.48

## Polygon pours and split planes (outlines as drawn)
GND on Bottom Layer "tga" (solid, remove dead copper, pour order 0): 30.48,73.66 83.82,73.66 83.82,31.242 30.48,31.242
GND on Top Layer "GND_L01_P001" (solid, remove dead copper, pour order 1): 48.514,74.422 48.514,100.076 30.48,100.076 30.48,99.314 30.48,31.242 83.82,31.242 83.82,74.422

## Keep-outs
Keep-Out Layer:
  lines w0.127: 30.48,32.762 30.48,98.434 32,99.954 82.18,99.954 83.82,98.314 83.82,33.062 82,31.242 68.58,31.242 34.29,31.242 32,31.242 30.48,32.762
  lines w1: 49.018,86.597 cw(c50.927,86.597) 50.927,88.506 ; 49.022,86.597 49.022,84.599 ccw(c50.932,84.599) 50.932,82.69 ; 50.927,88.502 56.646,88.502 ; 50.932,82.694 56.651,82.694 ; 62.226,76.581 ccw(c64.135,76.581) 64.135,74.672 ; 62.23,76.581 62.23,81.534 ; 64.135,74.676 78.232,74.676

## Other copper
Top Layer:
  rectangle net 3V3: 45.695,41.021 51.486,46.812

## Silkscreen, mask and mechanical layers (free items; w line width, h text height)
Top Overlay:
  rectangle: 82.016,78.994 83.82,82.042
  rectangle: 82.016,84.074 83.82,87.122
  lines w0.381: 48.679,95.161 53.34,99.822 ; 48.764,74.872 51.486,77.594 ; 48.824,85.146 50.622,86.944 ; 48.848,97.87 50.8,99.822 ; 48.9,77.704 50.698,79.502 ; 48.9,79.99 50.698,81.788 ; 48.9,82.784 50.698,84.582 ; 48.9,87.864 50.698,89.662 ; 49.087,93.029 55.88,99.822 ; 51.19,74.872 53.912,77.594 ; 52.032,93.434 56.047,97.449 58.42,99.822 ; 53.818,74.824 56.54,77.546 ; 54.47,93.332 60.96,99.822 ; 56.384,74.872 59.106,77.594 ; 57.061,93.383 63.551,99.873 ; 58.746,74.872 61.468,77.594 ; 59.677,93.383 66.167,99.873 ; 61.411,74.872 64.133,77.594 ; 62.192,93.383 68.682,99.873 ; 63.908,74.872 66.63,77.594 ; 64.706,93.383 71.196,99.873 ; 66.49,74.872 72.39,80.772 ; 67.272,93.383 73.762,99.873 ; 67.612,93.76 70.334,96.482 ; 69.012,74.854 72.39,78.232 ; 69.644,90.712 72.016,93.083 ; 69.694,80.59 72.416,83.312 ; 69.694,83.13 72.416,85.852 ; 69.694,85.67 72.416,88.392 ; 69.694,88.21 72.416,90.932 ; 69.71,93.383 76.2,99.873 ; 71.628,74.93 74.713,78.015 ; 74.098,95.231 78.74,99.873 ; 74.676,93.218 81.28,99.822 ; 77.266,93.268 83.058,99.06 ; 78.972,74.654 83.566,79.248 ; 79.756,93.218 83.566,97.028 ; 80.297,96.299 81.788,97.79 ; 80.551,94.013 81.788,95.25 ; 81.744,74.886 83.693,76.835 ; 82.329,83.091 83.566,84.328 ; 82.329,88.171 83.566,89.408 ; 82.329,90.711 83.566,91.948 ; 82.329,93.251 83.629,94.551
  lines w1.6: 48.26,99.06 48.26,74.168 82.804,74.168
  text "CT" at 36.576,97.449 h1.52
  text "FAN" at 75.028,75.819 h1.52
  text "POWER" at 34.036,68.072 h1.52
  text "ON" at 74.324,64.77 h1.52
  text "Gnd" at 44.255,63.507 h1.52
  text "5V" at 53.715,61.73 h1.02
  text "+5V" at 44.255,58.491 h1.52
  text "DETECT" at 75.946,54.864 h1.02
  text "DELAY" at 75.946,44.45 h1.02
  text "HOLD" at 76.2,35.052 h1.02
Bottom Overlay:
  lines w0.381: 48.679,95.161 53.34,99.822 ; 48.724,90.126 56.047,97.449 58.42,99.822 ; 48.824,85.146 50.203,86.525 ; 48.848,97.87 50.8,99.822 ; 48.9,79.99 52.527,83.617 ; 48.9,82.784 50.114,83.998 ; 48.9,87.864 51.765,90.729 ; 48.97,77.646 71.196,99.873 ; 49.018,75.126 51.74,77.848 ; 49.087,93.029 55.88,99.822 ; 51.444,75.126 53.862,77.543 ; 51.641,87.963 52.832,89.154 ; 52.832,74.872 53.739,74.872 78.74,99.873 ; 53.759,87.465 66.167,99.873 ; 54.287,85.478 68.682,99.873 ; 54.864,93.726 60.96,99.822 ; 55.626,81.534 64.283,90.524 ; 56.386,79.99 65.532,89.408 ; 56.386,92.708 63.551,99.873 ; 56.638,75.126 81.459,99.948 ; 59,75.126 63.708,79.834 ; 61.665,75.126 64.387,77.848 ; 64.162,75.126 66.371,77.335 ; 66.167,82.042 75.184,91.186 ; 66.49,74.872 75.184,83.566 ; 67.589,93.701 73.762,99.873 ; 68.605,92.278 76.2,99.873 ; 68.682,79.502 75.184,86.106 ; 68.682,82.042 75.184,88.646 ; 69.266,75.108 75.184,81.026 ; 71.564,74.867 75.184,78.486 ; 74.041,74.803 83.82,84.582 ; 76.749,74.971 83.82,82.042 ; 76.835,92.837 83.058,99.06 ; 78.972,74.654 83.82,79.502 ; 79.248,82.55 83.82,87.122 ; 79.248,85.09 83.82,89.662 ; 79.248,87.63 83.82,92.202 ; 79.248,90.17 83.82,94.742 ; 79.248,92.71 83.82,97.282 ; 81.744,74.886 83.82,76.962
  lines w1.6: 48.768,99.06 48.768,74.676 82.804,74.676
  text "Ver = '.Version'" at 79.248,31.75 h2